# EAGLE board KeyAmorMultirealSmallerTopLoader (EAGLE 5.10)
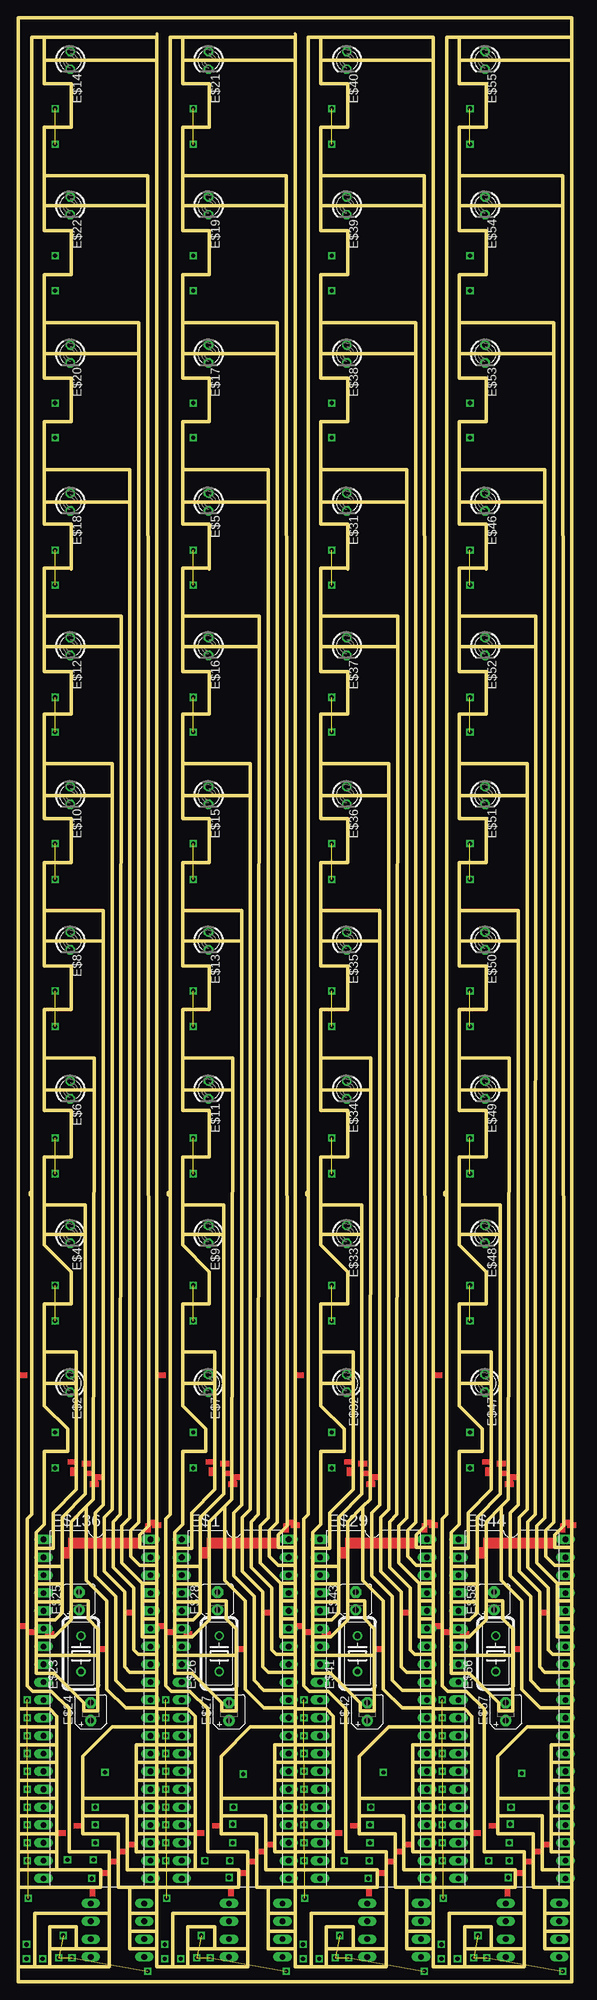
[diagram p0: board, top side]
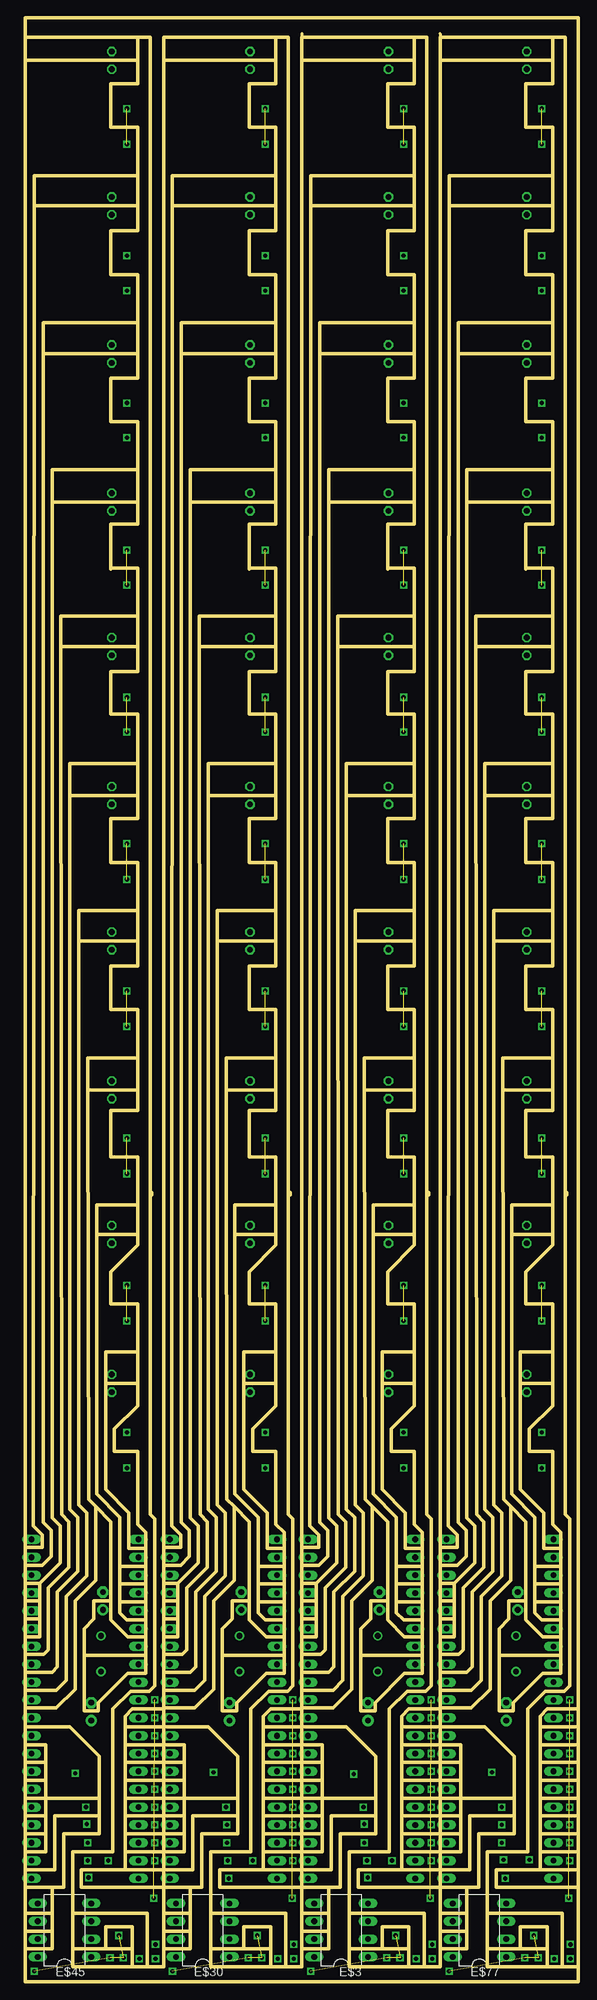
[diagram p1: board, bottom side, seen from below]

Size 78.74 x 279.65 mm. Coordinates in mm from the lower left corner, seen from the top.
Outline: 19.68,61.85 19.68,59.31
Outline: 19.68,59.31 19.68,56.77
Outline: 19.68,56.77 19.68,54.23
Outline: 19.68,49.15 19.68,46.61
Outline: 19.68,38.99 19.68,38.86
Outline: 19.68,13.46 15.88,13.46
Outline: 0,13.46 0,16
Outline: 0,16 0,18.54
Outline: 0,18.54 0,21.08
Outline: 0,21.08 0,23.62
Outline: 0,23.62 0,26.16
Outline: 0,26.16 0,28.7
Outline: 0,28.7 0,31.24
Outline: 0,31.24 0,33.78
Outline: 0,33.78 0,36.32
Outline: 0,36.32 0,38.86
Outline: 19.68,49.15 17.65,49.15 17.65,51.69
Outline: 19.68,51.69 17.65,51.69
Outline: 17.65,51.69 17.65,54.23
Outline: 19.68,54.23 17.65,54.23
Outline: 17.65,54.23 17.65,56.77
Outline: 19.68,56.77 17.65,56.77
Outline: 19.68,38.99 19.68,41.53
Outline: 19.68,41.53 19.68,44.07
Outline: 19.68,44.07 19.68,46.61
Outline: 0,16 5.46,16
Outline: 5.46,16 11.68,16 11.68,13.46 0,13.46
Outline: 9.14,23.62 9.14,21.08 14.22,21.08 14.22,13.46 15.88,13.46
Outline: 9.14,23.62 15.49,23.62 15.49,16 19.68,16
Outline: 9.14,23.62 9.14,26.16
Outline: 9.14,26.16 16.76,26.16
Outline: 16.76,26.16 16.76,23.62
Outline: 16.76,23.62 16.76,21.08
Outline: 16.76,21.08 16.76,18.54 19.68,18.54
Outline: 5.46,16 5.46,18.54
Outline: 5.46,18.54 5.46,21.08
Outline: 5.46,21.08 5.46,23.62
Outline: 5.46,23.62 5.46,26.16
Outline: 5.46,26.16 5.46,28.7
Outline: 5.46,28.7 5.46,31.24
Outline: 5.46,31.24 5.46,33.78
Outline: 5.46,33.78 5.46,36.32
Outline: 0,38.86 4.45,38.86 5.46,37.85 5.46,36.32
Outline: 5.46,18.54 0,18.54
Outline: 0,21.08 5.46,21.08
Outline: 0,23.62 5.46,23.62
Outline: 0,26.16 5.46,26.16
Outline: 0,28.7 5.46,28.7
Outline: 0,31.24 5.46,31.24
Outline: 0,33.78 5.46,33.78
Outline: 0,36.32 5.46,36.32
Outline: 16.76,26.16 19.68,26.16
Outline: 16.76,23.62 19.68,23.62
Outline: 16.76,21.08 19.68,21.08
Outline: 16.76,31.24 16.76,33.78 19.68,33.78
Outline: 16.76,31.24 16.76,28.7
Outline: 16.76,28.7 16.76,26.16
Outline: 19.68,28.7 16.76,28.7
Outline: 19.68,31.24 16.76,31.24
Outline: 19.68,36.32 13.34,36.32 9.14,32.13 9.14,26.16
Outline: 0,13.46 0,2.16
Outline: 2.29,2.16 4.45,2.16
Outline: 19.68,4.7 19.68,2.16 21.97,2.16
Outline: 19.68,4.7 19.68,7.24
Outline: 19.68,9.78 19.68,13.46
Outline: 19.68,61.85 17.27,61.85 17.27,63.63 18.54,64.9 18.41,252.86
Outline: 19.68,38.99 15.24,38.99 12.57,41.66 12.57,54.23 9.65,57.15 9.65,67.69
Outline: 19.68,41.53 15.24,41.53 13.84,42.93 13.84,54.86 10.92,57.78 10.92,66.8 12.06,67.94 12.06,148.21
Outline: 19.68,44.07 15.88,44.07 15.11,44.83 15.11,55.5 12.19,58.42 12.19,66.17 13.34,67.31 13.34,168.91
Outline: 17.65,56.77 14.73,59.69 14.73,64.9 15.88,66.04 15.88,210.69
Outline: 19.68,46.61 17.02,46.61 16.38,47.24 16.38,56.13 13.46,59.05 13.46,65.53 14.48,66.55 14.61,190.12
Outline: 12.95,9.78 12.95,4.7
Outline: 12.95,4.7 12.95,2.16 4.45,2.16
Outline: 19.68,4.7 15.88,4.7 15.88,7.24
Outline: 12.95,4.7 8.26,4.7
Outline: 19.68,7.24 15.88,7.24
Outline: 15.88,7.24 15.88,9.78
Outline: 15.88,9.78 19.68,9.78
Outline: 0,2.16 2.29,2.16
Outline: 8.26,4.7 8.26,7.87 4.45,7.87 4.45,4.7
Outline: 12.95,9.78 2.29,9.78 2.29,2.16
Outline: 15.88,9.78 15.88,13.46
Outline: 19.68,59.31 17.27,59.31 16,60.58 16,64.26 17.14,65.41 17.14,231.78
Outline: 4.45,2.16 4.45,4.7
Outline: 8.26,4.7 4.45,4.7
Outline: 19.68,61.85 19.68,273.56
Outline: 15.88,210.69 15.88,215.26 3.68,215.26
Outline: 7.49,201.29 3.68,201.29 3.68,194.44
Outline: 6.22,56.64 6.22,59.18
Outline: 6.22,59.18 6.22,66.17 9.53,69.47 9.53,106.43
Outline: 3.68,89.66 3.68,96.52 7.49,96.52 7.49,101.09 3.68,104.9 3.68,106.43
Outline: 3.68,89.66 8.26,89.66 8.26,85.22
Outline: 3.68,131.57 3.68,127
Outline: 10.79,127 3.68,127
Outline: 3.68,131.57 10.79,131.57 10.79,127
Outline: 3.68,110.62 3.68,117.47 7.49,117.47 7.49,124.08 3.68,124.08 3.68,127
Outline: 3.68,152.53 3.68,148.21
Outline: 3.68,148.21 12.06,148.21
Outline: 3.68,152.53 12.06,152.53 12.06,148.21
Outline: 3.68,131.57 3.68,138.43 7.49,138.43 7.49,144.65 3.68,144.65 3.68,148.21
Outline: 3.68,173.48 3.68,168.91
Outline: 3.68,168.91 13.34,168.91
Outline: 13.34,168.91 13.34,173.48 3.68,173.48
Outline: 3.68,152.53 3.68,159.38 7.49,159.38 7.49,165.61 3.68,165.61 3.68,168.91
Outline: 3.68,194.44 3.68,190.12
Outline: 3.68,190.12 14.61,190.12
Outline: 3.68,194.44 14.61,194.44 14.61,190.12
Outline: 3.68,173.48 3.68,180.47 7.49,180.47 7.49,186.56 3.68,186.56 3.68,190.12
Outline: 3.68,215.26 3.68,210.69
Outline: 3.68,210.69 15.88,210.69
Outline: 7.49,201.17 7.49,201.29
Outline: 7.49,201.29 7.49,207.52 3.68,207.52 3.68,210.69
Outline: 3.68,236.22 3.68,231.78
Outline: 3.68,231.78 17.14,231.78
Outline: 17.14,231.78 17.14,236.22 3.68,236.22
Outline: 3.68,215.26 3.68,222.12 7.49,222.12 7.49,228.35 3.68,228.35 3.68,231.78
Outline: 3.68,257.18 3.68,252.86
Outline: 3.68,252.86 18.41,252.86
Outline: 3.68,257.18 18.41,257.18 18.41,252.86
Outline: 3.68,236.22 3.68,243.08 7.49,243.08 7.49,249.3 3.68,249.3 3.68,252.86
Outline: 19.68,273.56 19.68,276.86 3.68,276.86
Outline: 3.68,257.18 3.68,264.03 7.49,264.03 7.49,270.26 3.68,270.26 3.68,273.56
Outline: 3.68,276.86 1.91,276.86 1.91,66.55 1.27,65.91 1.27,42.16 2.03,41.4 4.7,41.4 7.24,38.86 7.24,18.54 12.95,18.54 12.95,9.78
Outline: 3.68,89.66 3.68,85.22
Outline: 3.68,85.22 3.68,82.04 6.99,78.74 6.99,75.56 3.68,75.56 3.68,65.15 2.54,64.01 2.54,61.72
Outline: 8.26,85.22 8.26,70.1 4.95,66.8 4.95,61.72 2.54,61.72
Outline: 9.53,106.43 9.53,110.62 3.68,110.62
Outline: 3.68,106.43 3.68,110.62
Outline: 3.68,106.43 9.53,106.43
Outline: 10.67,68.71 10.79,127
Outline: 1.65,112.01 1.65,112.39
Outline: 2.54,61.72 2.54,59.18
Outline: 2.54,59.18 2.54,56.64
Outline: 2.54,56.64 2.54,54.1
Outline: 2.54,54.1 2.54,51.56
Outline: 2.54,51.56 2.54,49.15
Outline: 2.54,49.15 2.54,46.48
Outline: 2.54,46.48 2.54,43.94 5.08,43.94 9.27,39.75 9.27,38.61 11.3,38.61 11.3,46.48
Outline: 2.54,59.18 6.22,59.18
Outline: 2.54,56.64 6.22,56.64
Outline: 2.54,49.15 5.08,49.15 7.49,51.56 7.49,54.23
Outline: 6.22,56.64 6.22,54.1
Outline: 6.22,54.1 6.22,52.58 5.21,51.56 2.54,51.56
Outline: 2.54,54.1 6.22,54.1
Outline: 11.3,46.48 2.54,46.48
Outline: 7.49,54.23 7.49,65.53 9.65,67.69
Outline: 11.3,46.48 11.3,50.29 9.91,51.69 9.91,54.23 7.49,54.23
Outline: 3.68,276.86 3.68,273.56
Outline: 3.68,273.56 19.68,273.56
Outline: 9.65,67.69 10.67,68.71
Outline: 10.67,68.71 10.67,69.98
Outline: 8.26,85.22 3.68,85.22
Outline: 19.68,49.15 19.68,51.69
Outline: 0,2.16 0,0 78.74,0 78.74,4.7
Outline: 39.37,61.85 39.37,59.31
Outline: 39.37,59.31 39.37,56.77
Outline: 39.37,56.77 39.37,54.23
Outline: 39.37,49.15 39.37,46.61
Outline: 39.37,38.99 39.37,38.86
Outline: 39.37,13.46 35.56,13.46
Outline: 19.68,13.46 19.68,16
Outline: 19.68,16 19.68,18.54
Outline: 19.68,18.54 19.68,21.08
Outline: 19.68,21.08 19.68,23.62
Outline: 19.68,23.62 19.68,26.16
Outline: 19.68,26.16 19.68,28.7
Outline: 19.68,28.7 19.68,31.24
Outline: 19.68,31.24 19.68,33.78
Outline: 19.68,33.78 19.68,36.32
Outline: 19.68,36.32 19.68,38.86
Outline: 39.37,49.15 37.34,49.15 37.34,51.69
Outline: 39.37,51.69 37.34,51.69
Outline: 37.34,51.69 37.34,54.23
Outline: 39.37,54.23 37.34,54.23
Outline: 37.34,54.23 37.34,56.77
Outline: 39.37,56.77 37.34,56.77
Outline: 39.37,38.99 39.37,41.53
Outline: 39.37,41.53 39.37,44.07
Outline: 39.37,44.07 39.37,46.61
Outline: 19.68,16 25.15,16
Outline: 25.15,16 31.37,16 31.37,13.46 19.68,13.46
Outline: 28.83,23.62 28.83,21.08 33.91,21.08 33.91,13.46 35.56,13.46
Outline: 28.83,23.62 35.18,23.62 35.18,16 39.37,16
Outline: 28.83,23.62 28.83,26.16
Outline: 28.83,26.16 36.45,26.16
Outline: 36.45,26.16 36.45,23.62
Outline: 36.45,23.62 36.45,21.08
Outline: 36.45,21.08 36.45,18.54 39.37,18.54
Outline: 25.15,16 25.15,18.54
Outline: 25.15,18.54 25.15,21.08
Outline: 25.15,21.08 25.15,23.62
Outline: 25.15,23.62 25.15,26.16
Outline: 25.15,26.16 25.15,28.7
Outline: 25.15,28.7 25.15,31.24
Outline: 25.15,31.24 25.15,33.78
Outline: 25.15,33.78 25.15,36.32
Outline: 19.68,38.86 24.13,38.86 25.15,37.85 25.15,36.32
Outline: 25.15,18.54 19.68,18.54
Outline: 19.68,21.08 25.15,21.08
Outline: 19.68,23.62 25.15,23.62
Outline: 19.68,26.16 25.15,26.16
Outline: 19.68,28.7 25.15,28.7
Outline: 19.68,31.24 25.15,31.24
Outline: 19.68,33.78 25.15,33.78
Outline: 19.68,36.32 25.15,36.32
Outline: 36.45,26.16 39.37,26.16
Outline: 36.45,23.62 39.37,23.62
Outline: 36.45,21.08 39.37,21.08
Outline: 36.45,31.24 36.45,33.78 39.37,33.78
Outline: 36.45,31.24 36.45,28.7
Outline: 36.45,28.7 36.45,26.16
Outline: 39.37,28.7 36.45,28.7
Outline: 39.37,31.24 36.45,31.24
Outline: 39.37,36.32 33.02,36.32 28.83,32.13 28.83,26.16
Outline: 19.68,9.78 19.68,7.24
Outline: 21.97,2.16 24.13,2.16
Outline: 39.37,4.7 39.37,2.16 41.66,2.16
Outline: 39.37,4.7 39.37,7.24
Outline: 39.37,9.78 39.37,13.46
Outline: 39.37,61.85 36.96,61.85 36.96,63.63 38.23,64.9 38.1,252.86
Outline: 39.37,38.99 34.92,38.99 32.26,41.66 32.26,54.23 29.34,57.15 29.34,67.69
Outline: 39.37,41.53 34.92,41.53 33.53,42.93 33.53,54.86 30.61,57.78 30.61,66.8 31.75,67.94 31.75,148.21
Outline: 39.37,44.07 35.56,44.07 34.8,44.83 34.8,55.5 31.88,58.42 31.88,66.17 33.02,67.31 33.02,168.91
Outline: 37.34,56.77 34.42,59.69 34.42,64.9 35.56,66.04 35.56,210.69
Outline: 39.37,46.61 36.7,46.61 36.07,47.24 36.07,56.13 33.15,59.05 33.15,65.53 34.16,66.55 34.29,190.12
Outline: 32.64,9.78 32.64,4.7
Outline: 32.64,4.7 32.64,2.16 24.13,2.16
Outline: 39.37,4.7 35.56,4.7 35.56,7.24
Outline: 32.64,4.7 27.94,4.7
Outline: 39.37,7.24 35.56,7.24
Outline: 35.56,7.24 35.56,9.78
Outline: 35.56,9.78 39.37,9.78
Outline: 27.94,4.7 27.94,7.87 24.13,7.87 24.13,4.7
Outline: 32.64,9.78 21.97,9.78 21.97,2.16
Outline: 35.56,9.78 35.56,13.46
Outline: 39.37,59.31 36.96,59.31 35.69,60.58 35.69,64.26 36.83,65.41 36.83,231.78
Outline: 24.13,2.16 24.13,4.7
Outline: 27.94,4.7 24.13,4.7
Outline: 39.37,61.85 39.37,273.56
Outline: 35.56,210.69 35.56,215.26 23.37,215.26
Outline: 27.18,201.29 23.37,201.29 23.37,194.44
Outline: 25.91,56.64 25.91,59.18
Outline: 25.91,59.18 25.91,66.17 29.21,69.47 29.21,106.43
Outline: 23.37,89.66 23.37,96.52 27.18,96.52 27.18,101.09 23.37,104.9 23.37,106.43
Outline: 23.37,89.66 27.94,89.66 27.94,85.22
Outline: 23.37,131.57 23.37,127
Outline: 30.48,127 23.37,127
Outline: 23.37,131.57 30.48,131.57 30.48,127
Outline: 23.37,110.62 23.37,117.47 27.18,117.47 27.18,124.08 23.37,124.08 23.37,127
Outline: 23.37,152.53 23.37,148.21
Outline: 23.37,148.21 31.75,148.21
Outline: 23.37,152.53 31.75,152.53 31.75,148.21
Outline: 23.37,131.57 23.37,138.43 27.18,138.43 27.18,144.65 23.37,144.65 23.37,148.21
Outline: 23.37,173.48 23.37,168.91
Outline: 23.37,168.91 33.02,168.91
Outline: 33.02,168.91 33.02,173.48 23.37,173.48
Outline: 23.37,152.53 23.37,159.38 27.18,159.38 27.18,165.61 23.37,165.61 23.37,168.91
Outline: 23.37,194.44 23.37,190.12
Outline: 23.37,190.12 34.29,190.12
Outline: 23.37,194.44 34.29,194.44 34.29,190.12
Outline: 23.37,173.48 23.37,180.47 27.18,180.47 27.18,186.56 23.37,186.56 23.37,190.12
Outline: 23.37,215.26 23.37,210.69
Outline: 23.37,210.69 35.56,210.69
Outline: 27.18,201.17 27.18,201.29
Outline: 27.18,201.29 27.18,207.52 23.37,207.52 23.37,210.69
Outline: 23.37,236.22 23.37,231.78
Outline: 23.37,231.78 36.83,231.78
Outline: 36.83,231.78 36.83,236.22 23.37,236.22
Outline: 23.37,215.26 23.37,222.12 27.18,222.12 27.18,228.35 23.37,228.35 23.37,231.78
Outline: 23.37,257.18 23.37,252.86
Outline: 23.37,252.86 38.1,252.86
Outline: 23.37,257.18 38.1,257.18 38.1,252.86
Outline: 23.37,236.22 23.37,243.08 27.18,243.08 27.18,249.3 23.37,249.3 23.37,252.86
Outline: 39.37,273.56 39.37,276.86 23.37,276.86
Outline: 23.37,257.18 23.37,264.03 27.18,264.03 27.18,270.26 23.37,270.26 23.37,273.56
Outline: 19.68,51.69 19.68,54.23
Outline: 23.37,276.86 21.59,276.86 21.59,66.55 20.95,65.91 20.95,42.16 21.72,41.4 24.38,41.4 26.92,38.86 26.92,18.54 32.64,18.54 32.64,9.78
Outline: 23.37,89.66 23.37,85.22
Outline: 23.37,85.22 23.37,82.04 26.67,78.74 26.67,75.56 23.37,75.56 23.37,65.15 22.23,64.01 22.23,61.72
Outline: 27.94,85.22 27.94,70.1 24.64,66.8 24.64,61.72 22.23,61.72
Outline: 29.21,106.43 29.21,110.62 23.37,110.62
Outline: 23.37,106.43 23.37,110.62
Outline: 23.37,106.43 29.21,106.43
Outline: 30.35,68.71 30.48,127
Outline: 21.34,112.01 21.34,112.39
Outline: 22.23,61.72 22.23,59.18
Outline: 22.23,59.18 22.23,56.64
Outline: 22.23,56.64 22.23,54.1
Outline: 22.23,54.1 22.23,51.56
Outline: 22.23,51.56 22.23,49.15
Outline: 22.23,49.15 22.23,46.48
Outline: 22.23,46.48 22.23,43.94 24.77,43.94 28.96,39.75 28.96,38.61 30.99,38.61 30.99,46.48
Outline: 22.23,59.18 25.91,59.18
Outline: 22.23,56.64 25.91,56.64
Outline: 22.23,49.15 24.77,49.15 27.18,51.56 27.18,54.23
Outline: 25.91,56.64 25.91,54.1
Outline: 25.91,54.1 25.91,52.58 24.89,51.56 22.23,51.56
Outline: 22.23,54.1 25.91,54.1
Outline: 30.99,46.48 22.23,46.48
Outline: 27.18,54.23 27.18,65.53 29.34,67.69
Outline: 30.99,46.48 30.99,50.29 29.59,51.69 29.59,54.23 27.18,54.23
Outline: 23.37,276.86 23.37,273.56
Outline: 23.37,273.56 39.37,273.56
Outline: 29.34,67.69 30.35,68.71
Outline: 30.35,68.71 30.35,69.98
Outline: 27.94,85.22 23.37,85.22
Outline: 39.37,49.15 39.37,51.69
Outline: 59.05,61.85 59.05,59.31
Outline: 59.05,59.31 59.05,56.77
Outline: 59.05,56.77 59.05,54.23
Outline: 59.05,49.15 59.05,46.61
Outline: 59.05,38.99 59.05,38.86
Outline: 59.05,13.46 55.24,13.46
Outline: 39.37,13.46 39.37,16
Outline: 39.37,16 39.37,18.54
Outline: 39.37,18.54 39.37,21.08
Outline: 39.37,21.08 39.37,23.62
Outline: 39.37,23.62 39.37,26.16
Outline: 39.37,26.16 39.37,28.7
Outline: 39.37,28.7 39.37,31.24
Outline: 39.37,31.24 39.37,33.78
Outline: 39.37,33.78 39.37,36.32
Outline: 39.37,36.32 39.37,38.86
Outline: 59.05,49.15 57.02,49.15 57.02,51.69
Outline: 59.05,51.69 57.02,51.69
Outline: 57.02,51.69 57.02,54.23
Outline: 59.05,54.23 57.02,54.23
Outline: 57.02,54.23 57.02,56.77
Outline: 59.05,56.77 57.02,56.77
Outline: 59.05,38.99 59.05,41.53
Outline: 59.05,41.53 59.05,44.07
Outline: 59.05,44.07 59.05,46.61
Outline: 39.37,16 44.83,16
Outline: 44.83,16 51.05,16 51.05,13.46 39.37,13.46
Outline: 48.51,23.62 48.51,21.08 53.59,21.08 53.59,13.46 55.24,13.46
Outline: 48.51,23.62 54.86,23.62 54.86,16 59.05,16
Outline: 48.51,23.62 48.51,26.16
Outline: 48.51,26.16 56.13,26.16
Outline: 56.13,26.16 56.13,23.62
Outline: 56.13,23.62 56.13,21.08
Outline: 56.13,21.08 56.13,18.54 59.05,18.54
Outline: 44.83,16 44.83,18.54
Outline: 44.83,18.54 44.83,21.08
Outline: 44.83,21.08 44.83,23.62
Outline: 44.83,23.62 44.83,26.16
Outline: 44.83,26.16 44.83,28.7
Outline: 44.83,28.7 44.83,31.24
Outline: 44.83,31.24 44.83,33.78
Outline: 44.83,33.78 44.83,36.32
Outline: 39.37,38.86 43.81,38.86 44.83,37.85 44.83,36.32
Outline: 44.83,18.54 39.37,18.54
Outline: 39.37,21.08 44.83,21.08
Outline: 39.37,23.62 44.83,23.62
Outline: 39.37,26.16 44.83,26.16
Outline: 39.37,28.7 44.83,28.7
Outline: 39.37,31.24 44.83,31.24
Outline: 39.37,33.78 44.83,33.78
Outline: 39.37,36.32 44.83,36.32
Outline: 56.13,26.16 59.05,26.16
Outline: 56.13,23.62 59.05,23.62
Outline: 56.13,21.08 59.05,21.08
Outline: 56.13,31.24 56.13,33.78 59.05,33.78
Outline: 56.13,31.24 56.13,28.7
Outline: 56.13,28.7 56.13,26.16
Outline: 59.05,28.7 56.13,28.7
Outline: 59.05,31.24 56.13,31.24
Outline: 59.05,36.32 52.7,36.32 48.51,32.13 48.51,26.16
Outline: 39.37,9.78 39.37,7.24
Outline: 41.66,2.16 43.81,2.16
Outline: 59.05,4.7 59.05,2.16 61.34,2.16
Outline: 59.05,4.7 59.05,7.24
Outline: 59.05,9.78 59.05,13.46
Outline: 59.05,61.85 56.64,61.85 56.64,63.63 57.91,64.9 57.78,252.86
Outline: 59.05,38.99 54.61,38.99 51.94,41.66 51.94,54.23 49.02,57.15 49.02,67.69
Outline: 59.05,41.53 54.61,41.53 53.21,42.93 53.21,54.86 50.29,57.78 50.29,66.8 51.44,67.94 51.44,148.21
Outline: 59.05,44.07 55.24,44.07 54.48,44.83 54.48,55.5 51.56,58.42 51.56,66.17 52.7,67.31 52.7,168.91
Outline: 57.02,56.77 54.1,59.69 54.1,64.9 55.24,66.04 55.24,210.69
Outline: 59.05,46.61 56.39,46.61 55.75,47.24 55.75,56.13 52.83,59.05 52.83,65.53 53.85,66.55 53.98,190.12
Outline: 52.32,9.78 52.32,4.7
Outline: 52.32,4.7 52.32,2.16 43.81,2.16
Outline: 59.05,4.7 55.24,4.7 55.24,7.24
Outline: 52.32,4.7 47.62,4.7
Outline: 59.05,7.24 55.24,7.24
Outline: 55.24,7.24 55.24,9.78
Outline: 55.24,9.78 59.05,9.78
Outline: 47.62,4.7 47.62,7.87 43.81,7.87 43.81,4.7
Outline: 52.32,9.78 41.66,9.78 41.66,2.16
Outline: 55.24,9.78 55.24,13.46
Outline: 59.05,59.31 56.64,59.31 55.37,60.58 55.37,64.26 56.52,65.41 56.52,231.78
Outline: 43.81,2.16 43.81,4.7
Outline: 47.62,4.7 43.81,4.7
Outline: 59.05,61.85 59.05,273.56
Outline: 55.24,210.69 55.24,215.26 43.05,215.26
Outline: 46.86,201.29 43.05,201.29 43.05,194.44
Outline: 45.59,56.64 45.59,59.18
Outline: 45.59,59.18 45.59,66.17 48.9,69.47 48.9,106.43
Outline: 43.05,89.66 43.05,96.52 46.86,96.52 46.86,101.09 43.05,104.9 43.05,106.43
Outline: 43.05,89.66 47.62,89.66 47.62,85.22
Outline: 43.05,131.57 43.05,127
Outline: 50.16,127 43.05,127
Outline: 43.05,131.57 50.16,131.57 50.16,127
Outline: 43.05,110.62 43.05,117.47 46.86,117.47 46.86,124.08 43.05,124.08 43.05,127
Outline: 43.05,152.53 43.05,148.21
Outline: 43.05,148.21 51.44,148.21
Outline: 43.05,152.53 51.44,152.53 51.44,148.21
Outline: 43.05,131.57 43.05,138.43 46.86,138.43 46.86,144.65 43.05,144.65 43.05,148.21
Outline: 43.05,173.48 43.05,168.91
Outline: 43.05,168.91 52.7,168.91
Outline: 52.7,168.91 52.7,173.48 43.05,173.48
Outline: 43.05,152.53 43.05,159.38 46.86,159.38 46.86,165.61 43.05,165.61 43.05,168.91
Outline: 43.05,194.44 43.05,190.12
Outline: 43.05,190.12 53.98,190.12
Outline: 43.05,194.44 53.98,194.44 53.98,190.12
Outline: 43.05,173.48 43.05,180.47 46.86,180.47 46.86,186.56 43.05,186.56 43.05,190.12
Outline: 43.05,215.26 43.05,210.69
Outline: 43.05,210.69 55.24,210.69
Outline: 46.86,201.17 46.86,201.29
Outline: 46.86,201.29 46.86,207.52 43.05,207.52 43.05,210.69
Outline: 43.05,236.22 43.05,231.78
Outline: 43.05,231.78 56.52,231.78
Outline: 56.52,231.78 56.52,236.22 43.05,236.22
Outline: 43.05,215.26 43.05,222.12 46.86,222.12 46.86,228.35 43.05,228.35 43.05,231.78
Outline: 43.05,257.18 43.05,252.86
Outline: 43.05,252.86 57.78,252.86
Outline: 43.05,257.18 57.78,257.18 57.78,252.86
Outline: 43.05,236.22 43.05,243.08 46.86,243.08 46.86,249.3 43.05,249.3 43.05,252.86
Outline: 59.05,273.56 59.05,276.86 43.05,276.86
Outline: 43.05,257.18 43.05,264.03 46.86,264.03 46.86,270.26 43.05,270.26 43.05,273.56
Outline: 39.37,51.69 39.37,54.23
Outline: 43.05,276.86 41.27,276.86 41.27,66.55 40.64,65.91 40.64,42.16 41.4,41.4 44.07,41.4 46.61,38.86 46.61,18.54 52.32,18.54 52.32,9.78
Outline: 43.05,89.66 43.05,85.22
Outline: 43.05,85.22 43.05,82.04 46.35,78.74 46.35,75.56 43.05,75.56 43.05,65.15 41.91,64.01 41.91,61.72
Outline: 47.62,85.22 47.62,70.1 44.32,66.8 44.32,61.72 41.91,61.72
Outline: 48.9,106.43 48.9,110.62 43.05,110.62
Outline: 43.05,106.43 43.05,110.62
Outline: 43.05,106.43 48.9,106.43
Outline: 50.04,68.71 50.16,127
Outline: 41.02,112.01 41.02,112.39
Outline: 41.91,61.72 41.91,59.18
Outline: 41.91,59.18 41.91,56.64
Outline: 41.91,56.64 41.91,54.1
Outline: 41.91,54.1 41.91,51.56
Outline: 41.91,51.56 41.91,49.15
Outline: 41.91,49.15 41.91,46.48
Outline: 41.91,46.48 41.91,43.94 44.45,43.94 48.64,39.75 48.64,38.61 50.67,38.61 50.67,46.48
Outline: 41.91,59.18 45.59,59.18
Outline: 41.91,56.64 45.59,56.64
Outline: 41.91,49.15 44.45,49.15 46.86,51.56 46.86,54.23
Outline: 45.59,56.64 45.59,54.1
Outline: 45.59,54.1 45.59,52.58 44.58,51.56 41.91,51.56
Outline: 41.91,54.1 45.59,54.1
Outline: 50.67,46.48 41.91,46.48
Outline: 46.86,54.23 46.86,65.53 49.02,67.69
Outline: 50.67,46.48 50.67,50.29 49.28,51.69 49.28,54.23 46.86,54.23
Outline: 43.05,276.86 43.05,273.56
Outline: 43.05,273.56 59.05,273.56
Outline: 49.02,67.69 50.04,68.71
Outline: 50.04,68.71 50.04,69.98
Outline: 47.62,85.22 43.05,85.22
Outline: 59.05,49.15 59.05,51.69
Outline: 78.74,61.85 78.74,59.31
Outline: 78.74,59.31 78.74,56.77
Outline: 78.74,56.77 78.74,54.23
Outline: 78.74,54.23 78.74,51.69
Outline: 78.74,49.15 78.74,46.61
Outline: 78.74,13.46 74.93,13.46
Outline: 59.05,13.46 59.05,16
Outline: 59.05,16 59.05,18.54
Outline: 59.05,18.54 59.05,21.08
Outline: 59.05,21.08 59.05,23.62
Outline: 59.05,23.62 59.05,26.16
Outline: 59.05,26.16 59.05,28.7
Outline: 59.05,28.7 59.05,31.24
Outline: 59.05,31.24 59.05,33.78
Outline: 59.05,33.78 59.05,36.32
Outline: 59.05,36.32 59.05,38.86
Outline: 78.74,49.15 76.71,49.15 76.71,51.69
Outline: 78.74,51.69 76.71,51.69
Outline: 76.71,51.69 76.71,54.23
Outline: 78.74,54.23 76.71,54.23
Outline: 76.71,54.23 76.71,56.77
Outline: 78.74,56.77 76.71,56.77
Outline: 78.74,38.99 78.74,41.53
Outline: 78.74,41.53 78.74,44.07
Outline: 78.74,44.07 78.74,46.61
Outline: 59.05,16 64.52,16
Outline: 64.52,16 70.74,16 70.74,13.46 59.05,13.46
Outline: 68.2,23.62 68.2,21.08 73.28,21.08 73.28,13.46 74.93,13.46
Outline: 68.2,23.62 74.55,23.62 74.55,16 78.74,16
Outline: 68.2,23.62 68.2,26.16
Outline: 68.2,26.16 75.82,26.16
Outline: 75.82,26.16 75.82,23.62
Outline: 75.82,23.62 75.82,21.08
Outline: 75.82,21.08 75.82,18.54 78.74,18.54
Outline: 64.52,16 64.52,18.54
Outline: 64.52,18.54 64.52,21.08
Outline: 64.52,21.08 64.52,23.62
Outline: 64.52,23.62 64.52,26.16
Outline: 64.52,26.16 64.52,28.7
Outline: 64.52,28.7 64.52,31.24
Outline: 64.52,31.24 64.52,33.78
Outline: 64.52,33.78 64.52,36.32
Outline: 59.05,38.86 63.5,38.86 64.52,37.85 64.52,36.32
Outline: 64.52,18.54 59.05,18.54
Outline: 59.05,21.08 64.52,21.08
Outline: 59.05,23.62 64.52,23.62
Outline: 59.05,26.16 64.52,26.16
Outline: 59.05,28.7 64.52,28.7
Outline: 59.05,31.24 64.52,31.24
Outline: 59.05,33.78 64.52,33.78
Outline: 59.05,36.32 64.52,36.32
Outline: 75.82,26.16 78.74,26.16
Outline: 75.82,23.62 78.74,23.62
Outline: 75.82,21.08 78.74,21.08
Outline: 75.82,31.24 75.82,33.78 78.74,33.78
Outline: 75.82,31.24 75.82,28.7
Outline: 75.82,28.7 75.82,26.16
Outline: 78.74,28.7 75.82,28.7
Outline: 78.74,31.24 75.82,31.24
Outline: 78.74,36.32 72.39,36.32 68.2,32.13 68.2,26.16
Outline: 59.05,9.78 59.05,7.24
Outline: 61.34,2.16 63.5,2.16
Outline: 78.74,4.7 78.74,7.24
Outline: 78.74,9.78 78.74,13.46
Outline: 78.74,61.85 76.33,61.85 76.33,63.63 77.6,64.9 77.47,252.86
Outline: 78.74,38.99 74.3,38.99 71.63,41.66 71.63,54.23 68.71,57.15 68.71,67.69
Outline: 78.74,41.53 74.3,41.53 72.9,42.93 72.9,54.86 69.98,57.78 69.98,66.8 71.12,67.94 71.12,148.21
Outline: 78.74,44.07 74.93,44.07 74.17,44.83 74.17,55.5 71.25,58.42 71.25,66.17 72.39,67.31 72.39,168.91
Outline: 76.71,56.77 73.79,59.69 73.79,64.9 74.93,66.04 74.93,210.69
Outline: 78.74,46.61 76.07,46.61 75.44,47.24 75.44,56.13 72.52,59.05 72.52,65.53 73.53,66.55 73.66,190.12
Outline: 72.01,9.78 72.01,4.7
Outline: 72.01,4.7 72.01,2.16 63.5,2.16
Outline: 78.74,4.7 74.93,4.7 74.93,7.24
Outline: 72.01,4.7 67.31,4.7
Outline: 78.74,7.24 74.93,7.24
Outline: 74.93,7.24 74.93,9.78
Outline: 74.93,9.78 78.74,9.78
Outline: 67.31,4.7 67.31,7.87 63.5,7.87 63.5,4.7
Outline: 72.01,9.78 61.34,9.78 61.34,2.16
Outline: 74.93,9.78 74.93,13.46
Outline: 78.74,59.31 76.33,59.31 75.06,60.58 75.06,64.26 76.2,65.41 76.2,231.78
Outline: 63.5,2.16 63.5,4.7
Outline: 67.31,4.7 63.5,4.7
Outline: 78.74,61.85 78.74,273.56
Outline: 74.93,210.69 74.93,215.26 62.74,215.26
Outline: 66.55,201.29 62.74,201.29 62.74,194.44
Outline: 65.28,56.64 65.28,59.18
Outline: 65.28,59.18 65.28,66.17 68.58,69.47 68.58,106.43
Outline: 62.74,89.66 62.74,96.52 66.55,96.52 66.55,101.09 62.74,104.9 62.74,106.43
Outline: 62.74,89.66 67.31,89.66 67.31,85.22
Outline: 62.74,131.57 62.74,127
Outline: 69.85,127 62.74,127
Outline: 62.74,131.57 69.85,131.57 69.85,127
Outline: 62.74,110.62 62.74,117.47 66.55,117.47 66.55,124.08 62.74,124.08 62.74,127
Outline: 62.74,152.53 62.74,148.21
Outline: 62.74,148.21 71.12,148.21
Outline: 62.74,152.53 71.12,152.53 71.12,148.21
Outline: 62.74,131.57 62.74,138.43 66.55,138.43 66.55,144.65 62.74,144.65 62.74,148.21
Outline: 62.74,173.48 62.74,168.91
Outline: 62.74,168.91 72.39,168.91
Outline: 72.39,168.91 72.39,173.48 62.74,173.48
Outline: 62.74,152.53 62.74,159.38 66.55,159.38 66.55,165.61 62.74,165.61 62.74,168.91
Outline: 62.74,194.44 62.74,190.12
Outline: 62.74,190.12 73.66,190.12
Outline: 62.74,194.44 73.66,194.44 73.66,190.12
Outline: 62.74,173.48 62.74,180.47 66.55,180.47 66.55,186.56 62.74,186.56 62.74,190.12
Outline: 62.74,215.26 62.74,210.69
Outline: 62.74,210.69 74.93,210.69
Outline: 66.55,201.17 66.55,201.29
Outline: 66.55,201.29 66.55,207.52 62.74,207.52 62.74,210.69
Outline: 62.74,236.22 62.74,231.78
Outline: 62.74,231.78 76.2,231.78
Outline: 76.2,231.78 76.2,236.22 62.74,236.22
Outline: 62.74,215.26 62.74,222.12 66.55,222.12 66.55,228.35 62.74,228.35 62.74,231.78
Outline: 62.74,257.18 62.74,252.86
Outline: 62.74,252.86 77.47,252.86
Outline: 62.74,257.18 77.47,257.18 77.47,252.86
Outline: 62.74,236.22 62.74,243.08 66.55,243.08 66.55,249.3 62.74,249.3 62.74,252.86
Outline: 78.74,273.56 78.74,276.86
Outline: 78.74,276.86 62.74,276.86
Outline: 62.74,257.18 62.74,264.03 66.55,264.03 66.55,270.26 62.74,270.26 62.74,273.56
Outline: 59.05,51.69 59.05,54.23
Outline: 62.74,276.86 60.96,276.86 60.96,66.55 60.33,65.91 60.33,42.16 61.09,41.4 63.75,41.4 66.29,38.86 66.29,18.54 72.01,18.54 72.01,9.78
Outline: 62.74,89.66 62.74,85.22
Outline: 62.74,85.22 62.74,82.04 66.04,78.74 66.04,75.56 62.74,75.56 62.74,65.15 61.59,64.01 61.59,61.72
Outline: 67.31,85.22 67.31,70.1 64.01,66.8 64.01,61.72 61.59,61.72
Outline: 68.58,106.43 68.58,110.62 62.74,110.62
Outline: 62.74,106.43 62.74,110.62
Outline: 62.74,106.43 68.58,106.43
Outline: 69.72,68.71 69.85,127
Outline: 60.71,112.01 60.71,112.39
Outline: 61.59,61.72 61.59,59.18
Outline: 61.59,59.18 61.59,56.64
Outline: 61.59,56.64 61.59,54.1
Outline: 61.59,54.1 61.59,51.56
Outline: 61.59,51.56 61.59,49.15
Outline: 61.59,49.15 61.59,46.48
Outline: 61.59,46.48 61.59,43.94 64.14,43.94 68.33,39.75 68.33,38.61 70.36,38.61 70.36,46.48
Outline: 61.59,59.18 65.28,59.18
Outline: 61.59,56.64 65.28,56.64
Outline: 61.59,49.15 64.14,49.15 66.55,51.56 66.55,54.23
Outline: 65.28,56.64 65.28,54.1
Outline: 65.28,54.1 65.28,52.58 64.26,51.56 61.59,51.56
Outline: 61.59,54.1 65.28,54.1
Outline: 70.36,46.48 61.59,46.48
Outline: 66.55,54.23 66.55,65.53 68.71,67.69
Outline: 70.36,46.48 70.36,50.29 68.96,51.69 68.96,54.23 66.55,54.23
Outline: 62.74,276.86 62.74,273.56
Outline: 62.74,273.56 78.74,273.56
Outline: 68.71,67.69 69.72,68.71
Outline: 69.72,68.71 69.72,69.98
Outline: 67.31,85.22 62.74,85.22
Outline: 78.74,13.46 78.74,16
Outline: 78.74,16 78.74,18.54
Outline: 78.74,18.54 78.74,21.08
Outline: 78.74,21.08 78.74,23.62
Outline: 78.74,23.62 78.74,26.16
Outline: 78.74,26.16 78.74,28.7
Outline: 78.74,28.7 78.74,31.24
Outline: 78.74,31.24 78.74,33.78
Outline: 78.74,33.78 78.74,36.32
Outline: 78.74,36.32 78.74,38.99
Outline: 78.74,9.78 78.74,7.24
Outline: 78.74,49.15 78.74,51.69
Outline: 0,38.86 0,279.65 78.74,279.65 78.74,276.86
Copper layers (1*16): Top 0.035mm / dielectric 1.5mm / Bottom 0.035mm
Design rules "default": minimum track width 10mil, minimum drill 24mil, track to track 8mil, track to pad 8mil, pad to pad 8mil, via to via 8mil, smd to smd 8mil, copper to edge 40mil, drill to drill 8mil, minimum pad ring 10mil, minimum via ring 8mil, stop-mask expansion 4mil, vias tented up to drill 0mil, thermal gap 10mil
Milling: 3 lines

## Footprints (pad centres in the part's own frame; a part is rotated, then mirrored left to right if it is on the bottom)
DIL40 = drill 0.813 long: 1 -24.13,-7.62; 2 -21.59,-7.62; 3 -19.05,-7.62; 4 -16.51,-7.62; 5 -13.97,-7.62; 6 -11.43,-7.62; 7 -8.89,-7.62; 8 -6.35,-7.62; 9 -3.81,-7.62; 10 -1.27,-7.62; 11 1.27,-7.62; 12 3.81,-7.62; 13 6.35,-7.62; 14 8.89,-7.62; 15 11.43,-7.62; 16 13.97,-7.62; 17 16.51,-7.62; 18 19.05,-7.62; 19 21.59,-7.62; 20 24.13,-7.62; 21 24.13,7.62; 22 21.59,7.62; 23 19.05,7.62; 24 16.51,7.62; 25 13.97,7.62; 26 11.43,7.62; 27 8.89,7.62; 28 6.35,7.62; 29 3.81,7.62; 30 1.27,7.62; 31 -1.27,7.62; 32 -3.81,7.62; 33 -6.35,7.62; 34 -8.89,7.62; 35 -11.43,7.62; 36 -13.97,7.62; 37 -16.51,7.62; 38 -19.05,7.62; 39 -21.59,7.62; 40 -24.13,7.62
LED3MM = drill 0.813 octagon: A -1.27,0; K 1.27,0
DIL08 = drill 0.813 long: 1 -3.81,-3.81; 2 -1.27,-3.81; 3 1.27,-3.81; 4 3.81,-3.81; 5 3.81,3.81; 6 1.27,3.81; 7 -1.27,3.81; 8 -3.81,3.81
HC18U-V = drill 0.813 round: 1 -2.54,0; 2 2.54,0
B45181A = drill 0.813 pad 1.6 round: + -1.27,0 | drill 0.813 pad 1.6 octagon: - 1.27,0

## Placement (x,y rotation side)
E$1  [DIL40]  30.86,38.86 270 top
E$2  [LED3MM]  7.37,85.22 270 top
E$3  [DIL08]  33.78,7.37 90 bottom
E$4  [LED3MM]  7.37,106.43 270 top
E$5  [LED3MM]  27.05,210.69 270 top
E$6  [LED3MM]  7.37,127 270 top
E$7  [LED3MM]  27.05,85.22 270 top
E$8  [LED3MM]  7.37,148.21 270 top
E$9  [LED3MM]  27.05,106.43 270 top
E$10  [LED3MM]  7.37,168.91 270 top
E$11  [LED3MM]  27.05,127 270 top
E$12  [LED3MM]  7.37,190.12 270 top
E$13  [LED3MM]  27.05,148.21 270 top
E$14  [LED3MM]  7.37,273.56 270 top
E$15  [LED3MM]  27.05,168.91 270 top
E$16  [LED3MM]  27.05,190.12 270 top
E$17  [LED3MM]  27.05,231.78 270 top
E$18  [LED3MM]  7.37,210.69 270 top
E$19  [LED3MM]  27.05,252.86 270 top
E$20  [LED3MM]  7.37,231.78 270 top
E$21  [LED3MM]  27.05,273.56 270 top
E$22  [LED3MM]  7.37,252.86 270 top
E$23  [HC18U-V]  8.89,46.74 90 top
E$24  [B45181A]  10.29,38.48 90 top
E$25  [B45181A]  8.64,54.23 90 top
E$26  [HC18U-V]  28.57,46.74 90 top
E$27  [B45181A]  29.97,38.48 90 top
E$28  [B45181A]  28.32,54.23 90 top
E$29  [DIL40]  50.55,38.86 270 top
E$30  [DIL08]  53.47,7.37 90 bottom
E$31  [LED3MM]  46.74,210.69 270 top
E$32  [LED3MM]  46.74,85.22 270 top
E$33  [LED3MM]  46.74,106.43 270 top
E$34  [LED3MM]  46.74,127 270 top
E$35  [LED3MM]  46.74,148.21 270 top
E$36  [LED3MM]  46.74,168.91 270 top
E$37  [LED3MM]  46.74,190.12 270 top
E$38  [LED3MM]  46.74,231.78 270 top
E$39  [LED3MM]  46.74,252.86 270 top
E$40  [LED3MM]  46.74,273.56 270 top
E$41  [HC18U-V]  48.26,46.74 90 top
E$42  [B45181A]  49.66,38.48 90 top
E$43  [B45181A]  48.01,54.23 90 top
E$44  [DIL40]  70.23,38.86 270 top
E$45  [DIL08]  73.15,7.37 90 bottom
E$46  [LED3MM]  66.42,210.69 270 top
E$47  [LED3MM]  66.42,85.22 270 top
E$48  [LED3MM]  66.42,106.43 270 top
E$49  [LED3MM]  66.42,127 270 top
E$50  [LED3MM]  66.42,148.21 270 top
E$51  [LED3MM]  66.42,168.91 270 top
E$52  [LED3MM]  66.42,190.12 270 top
E$53  [LED3MM]  66.42,231.78 270 top
E$54  [LED3MM]  66.42,252.86 270 top
E$55  [LED3MM]  66.42,273.56 270 top
E$56  [HC18U-V]  67.94,46.74 90 top
E$57  [B45181A]  69.34,38.48 90 top
E$58  [B45181A]  67.69,54.23 90 top
E$77  [DIL08]  14.1,7.37 90 bottom
E$136  [DIL40]  11.18,38.86 270 top

## Library data of the parts
E$1 E$29 E$44 E$136 = 74xx-eu
E$2 E$4-E$22 E$31-E$40 E$46-E$55 = led
E$3 E$30 E$45 E$77 = 40xx
E$23 E$26 E$41 E$56 = crystal
E$24 E$25 E$27 E$28 E$42 E$43 E$57 E$58 = rcl

## Tracks (layer width: path | path; a pad name or v marks a point on that pad's centre or on a via)
S$1  (via drill 0.6)
  other vias: 1.27,17.27
S$2  (via drill 0.6)
  other vias: 1.27,19.81
S$3  (via drill 0.6)
  other vias: 1.27,22.35
S$4  (via drill 0.6)
  other vias: 1.27,24.89
S$5  (via drill 0.6)  (3 unrouted)
  other vias: 6.35,6.6 5.71,3.43 18.41,1.52 7.62,3.43
S$6  (via drill 0.6)
  other vias: 1.27,27.43
S$7  (via drill 0.6)
  other vias: 1.27,29.97
S$8  (via drill 0.6)
  other vias: 1.27,32.51
S$9  (via drill 0.6)
  other vias: 1.27,35.05
S$10  (via drill 0.6)  (2 unrouted)
  other vias: 1.27,40.13 1.27,37.59 1.4,11.94
S$11  (via drill 0.6)  (1 unrouted)
  other vias: 5.21,266.7 5.21,261.62
S$12  (via drill 0.6)
  other vias: 5.21,245.75
S$13  (via drill 0.6)
  other vias: 5.21,240.79
S$14  (via drill 0.6)
  other vias: 5.21,224.79
S$15  (via drill 0.6)
  other vias: 5.21,219.84
S$16  (via drill 0.6)  (1 unrouted)
  other vias: 5.21,203.84 5.21,198.88
S$17  (via drill 0.6)  (1 unrouted)
  other vias: 5.21,182.88 5.21,177.93
S$18  (via drill 0.6)  (1 unrouted)
  other vias: 5.21,162.05 5.21,156.97
S$19  (via drill 0.6)  (1 unrouted)
  other vias: 5.21,141.1 5.21,136.02
S$20  (via drill 0.6)  (1 unrouted)
  other vias: 5.21,120.14 5.21,115.06
S$21  (via drill 0.6)  (1 unrouted)
  other vias: 5.21,99.19 5.21,94.11
S$22  (via drill 0.6)
  other vias: 5.21,73.15
S$23  (via drill 0.6)
  other vias: 5.21,78.23
S$24  (via drill 0.6)  (3 unrouted)
  other vias: 26.04,6.6 25.4,3.43 38.1,1.52 27.3,3.43
S$25  (via drill 0.6)
  other vias: 20.95,17.27
S$26  (via drill 0.6)
  other vias: 20.95,19.81
S$27  (via drill 0.6)
  other vias: 20.95,22.35
S$28  (via drill 0.6)
  other vias: 20.95,24.89
S$29  (via drill 0.6)
  other vias: 20.95,27.43
S$30  (via drill 0.6)
  other vias: 20.95,29.97
S$31  (via drill 0.6)
  other vias: 20.95,32.51
S$32  (via drill 0.6)
  other vias: 20.95,35.05
S$33  (via drill 0.6)  (1 unrouted)
  other vias: 24.89,266.7 24.89,261.62
S$34  (via drill 0.6)
  other vias: 24.89,245.75
S$35  (via drill 0.6)
  other vias: 24.89,240.79
S$36  (via drill 0.6)
  other vias: 24.89,224.79
S$37  (via drill 0.6)
  other vias: 24.89,219.84
S$38  (via drill 0.6)  (1 unrouted)
  other vias: 24.89,203.84 24.89,198.88
S$39  (via drill 0.6)  (1 unrouted)
  other vias: 24.89,182.88 24.89,177.93
S$40  (via drill 0.6)  (1 unrouted)
  other vias: 24.89,162.05 24.89,156.97
S$41  (via drill 0.6)  (1 unrouted)
  other vias: 24.89,141.1 24.89,136.02
S$42  (via drill 0.6)  (1 unrouted)
  other vias: 24.89,120.14 24.89,115.06
S$43  (via drill 0.6)  (2 unrouted)
  other vias: 20.95,40.13 20.95,37.59 21.08,11.94
S$44  (via drill 0.6)
  other vias: 24.89,73.15
S$45  (via drill 0.6)  (1 unrouted)
  other vias: 24.89,99.19 24.89,94.11
S$46  (via drill 0.6)
  other vias: 24.89,78.23
S$47  (via drill 0.6)
  other vias: 20.83,3.3
S$48  (via drill 0.6)
  other vias: 20.83,5.33
S$49  (via drill 0.6)
  other vias: 23.11,3.3
S$50  (via drill 0.6)  (3 unrouted)
  other vias: 45.72,6.6 45.09,3.43 57.78,1.52 46.99,3.43
S$51  (via drill 0.6)
  other vias: 40.64,17.27
S$52  (via drill 0.6)
  other vias: 40.64,19.81
S$53  (via drill 0.6)
  other vias: 40.64,22.35
S$54  (via drill 0.6)
  other vias: 40.64,24.89
S$55  (via drill 0.6)
  other vias: 40.64,27.43
S$56  (via drill 0.6)
  other vias: 40.64,29.97
S$57  (via drill 0.6)
  other vias: 40.64,32.51
S$58  (via drill 0.6)
  other vias: 40.64,35.05
S$59  (via drill 0.6)  (1 unrouted)
  other vias: 44.58,266.7 44.58,261.62
S$60  (via drill 0.6)
  other vias: 44.58,245.75
S$61  (via drill 0.6)
  other vias: 44.58,240.79
S$62  (via drill 0.6)
  other vias: 44.58,224.79
S$63  (via drill 0.6)
  other vias: 44.58,219.84
S$64  (via drill 0.6)  (1 unrouted)
  other vias: 44.58,203.84 44.58,198.88
S$65  (via drill 0.6)  (1 unrouted)
  other vias: 44.58,182.88 44.58,177.93
S$66  (via drill 0.6)  (1 unrouted)
  other vias: 44.58,162.05 44.58,156.97
S$67  (via drill 0.6)  (1 unrouted)
  other vias: 44.58,141.1 44.58,136.02
S$68  (via drill 0.6)  (1 unrouted)
  other vias: 44.58,120.14 44.58,115.06
S$69  (via drill 0.6)  (2 unrouted)
  other vias: 40.64,40.13 40.64,37.59 40.77,11.94
S$70  (via drill 0.6)
  other vias: 44.58,73.15
S$71  (via drill 0.6)  (1 unrouted)
  other vias: 44.58,99.19 44.58,94.11
S$72  (via drill 0.6)
  other vias: 44.58,78.23
S$73  (via drill 0.6)
  other vias: 40.51,3.3
S$74  (via drill 0.6)
  other vias: 40.51,5.33
S$75  (via drill 0.6)
  other vias: 42.8,3.3
S$76  (via drill 0.6)  (3 unrouted)
  other vias: 65.41,6.6 64.77,3.43 77.47,1.52 66.67,3.43
S$77  (via drill 0.6)
  other vias: 60.33,17.27
S$78  (via drill 0.6)
  other vias: 60.33,19.81
S$79  (via drill 0.6)
  other vias: 60.33,22.35
S$80  (via drill 0.6)
  other vias: 60.33,24.89
S$81  (via drill 0.6)
  other vias: 60.33,27.43
S$82  (via drill 0.6)
  other vias: 60.33,29.97
S$83  (via drill 0.6)
  other vias: 60.33,32.51
S$84  (via drill 0.6)
  other vias: 60.33,35.05
S$85  (via drill 0.6)  (1 unrouted)
  other vias: 64.26,266.7 64.26,261.62
S$86  (via drill 0.6)
  other vias: 64.26,245.75
S$87  (via drill 0.6)
  other vias: 64.26,240.79
S$88  (via drill 0.6)
  other vias: 64.26,224.79
S$89  (via drill 0.6)
  other vias: 64.26,219.84
S$90  (via drill 0.6)  (1 unrouted)
  other vias: 64.26,203.84 64.26,198.88
S$91  (via drill 0.6)  (1 unrouted)
  other vias: 64.26,182.88 64.26,177.93
S$92  (via drill 0.6)  (1 unrouted)
  other vias: 64.26,162.05 64.26,156.97
S$93  (via drill 0.6)  (1 unrouted)
  other vias: 64.26,141.1 64.26,136.02
S$94  (via drill 0.6)  (1 unrouted)
  other vias: 64.26,120.14 64.26,115.06
S$95  (via drill 0.6)  (2 unrouted)
  other vias: 60.33,40.13 60.33,37.59 60.45,11.94
S$96  (via drill 0.6)
  other vias: 64.26,73.15
S$97  (via drill 0.6)  (1 unrouted)
  other vias: 64.26,99.19 64.26,94.11
S$98  (via drill 0.6)
  other vias: 64.26,78.23
S$99  (via drill 0.6)
  other vias: 60.2,3.3
S$100  (via drill 0.6)
  other vias: 60.2,5.33
S$101  (via drill 0.6)
  other vias: 62.48,3.3
S$102  (via drill 0.6)
  other vias: 71.63,29.72
S$103  (via drill 0.6)
  other vias: 51.94,29.84
S$104  (via drill 0.6)
  other vias: 32,29.59
S$105  (via drill 0.6)
  other vias: 12.32,29.84
S$106  (via drill 0.6)
  other vias: 69.72,14.86
S$107  (via drill 0.6)
  other vias: 69.85,17.27
S$108  (via drill 0.6)
  other vias: 69.85,19.81
S$109  (via drill 0.6)
  other vias: 69.98,22.48
S$110  (via drill 0.6)
  other vias: 70.1,24.89
S$111  (via drill 0.6)
  other vias: 49.78,14.73
S$112  (via drill 0.6)
  other vias: 49.91,17.27
S$113  (via drill 0.6)
  other vias: 50.04,19.81
S$114  (via drill 0.6)
  other vias: 50.04,22.35
S$115  (via drill 0.6)
  other vias: 50.16,24.89
S$116  (via drill 0.6)
  other vias: 29.97,14.86
S$117  (via drill 0.6)
  other vias: 30.1,17.27
S$118  (via drill 0.6)
  other vias: 30.48,19.81
S$119  (via drill 0.6)
  other vias: 30.48,22.48
S$120  (via drill 0.6)
  other vias: 30.61,24.89
S$121  (via drill 0.6)
  other vias: 10.41,14.73
S$122  (via drill 0.6)
  other vias: 10.67,17.4
S$123  (via drill 0.6)
  other vias: 10.92,19.81
S$124  (via drill 0.6)
  other vias: 10.92,22.35
S$125  (via drill 0.6)
  other vias: 10.92,24.89
S$126  (via drill 0.6)
  other vias: 66.93,17.27
S$127  (via drill 0.6)
  other vias: 46.35,17.27
S$128  (via drill 0.6)
  other vias: 26.54,17.27
S$129  (via drill 0.6)
  other vias: 6.99,17.4
S$139  (via drill 0.6)
  other vias: 1.14,3.3
S$140  (via drill 0.6)
  other vias: 1.14,5.33
S$153  (via drill 0.6)
  other vias: 3.43,3.3
(copper drawn outside any net)
  shapes: Top area x132

## Text on the board
Unrouted: * | * | * | * | * | * | * | * | * | * | * | * | * | * | * | * | * | * | * | * | * | * | * | * | * | * | * | * | * | * | * | * | * | * | * | * | * | * | * | * | * | * | * | * | * | * | * | * | * | * | * | * | * | * | * | * | * | * | * | * | * | * | * | * | * | * | * | * | * | * | * | * | * | * | * | * | * | * | * | * | * | * | * | * | V+ | outA | V+ | outA | V+ | outA | V+ | outA | OUTB | INA- | OUTB | INA- | OUTB | INA- | OUTB | INA- | INB- | INA+ | INB- | INA+ | INB- | INA+ | INB- | INA+ | INB+ | INB+ | INB+ | INB+ | V- | V- | V- | V-